# Altium PCB Analizador_de_espectro.PcbDoc (part 1 of 2)
Units mil, origin at the board's own origin, x right, y up, seen from the top; angles counter-clockwise.
Board outline 4891.73 x 3750 mil, 2 copper layers (Top Layer, Bottom Layer); 140 components, 98 nets, 612 pads, 248 vias.
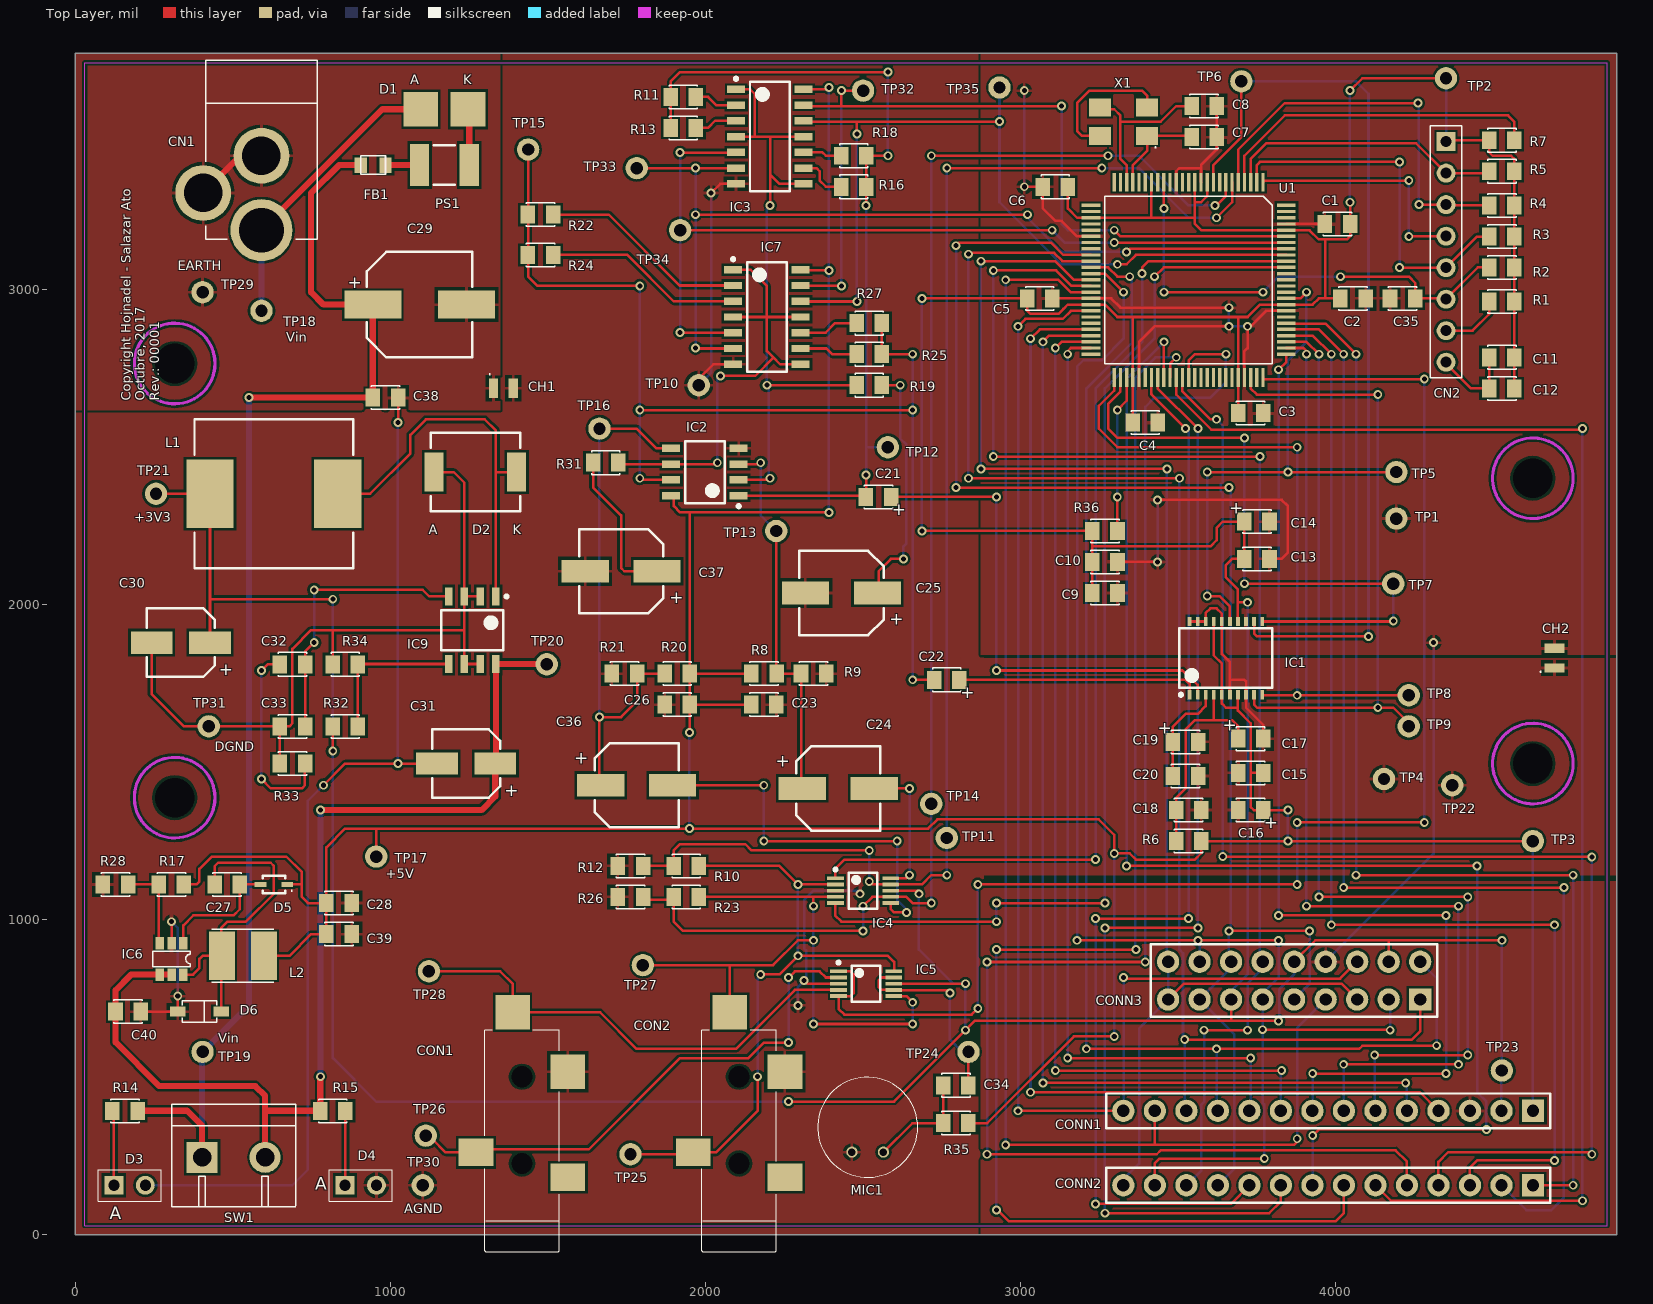
[diagram p0: Top Layer view]
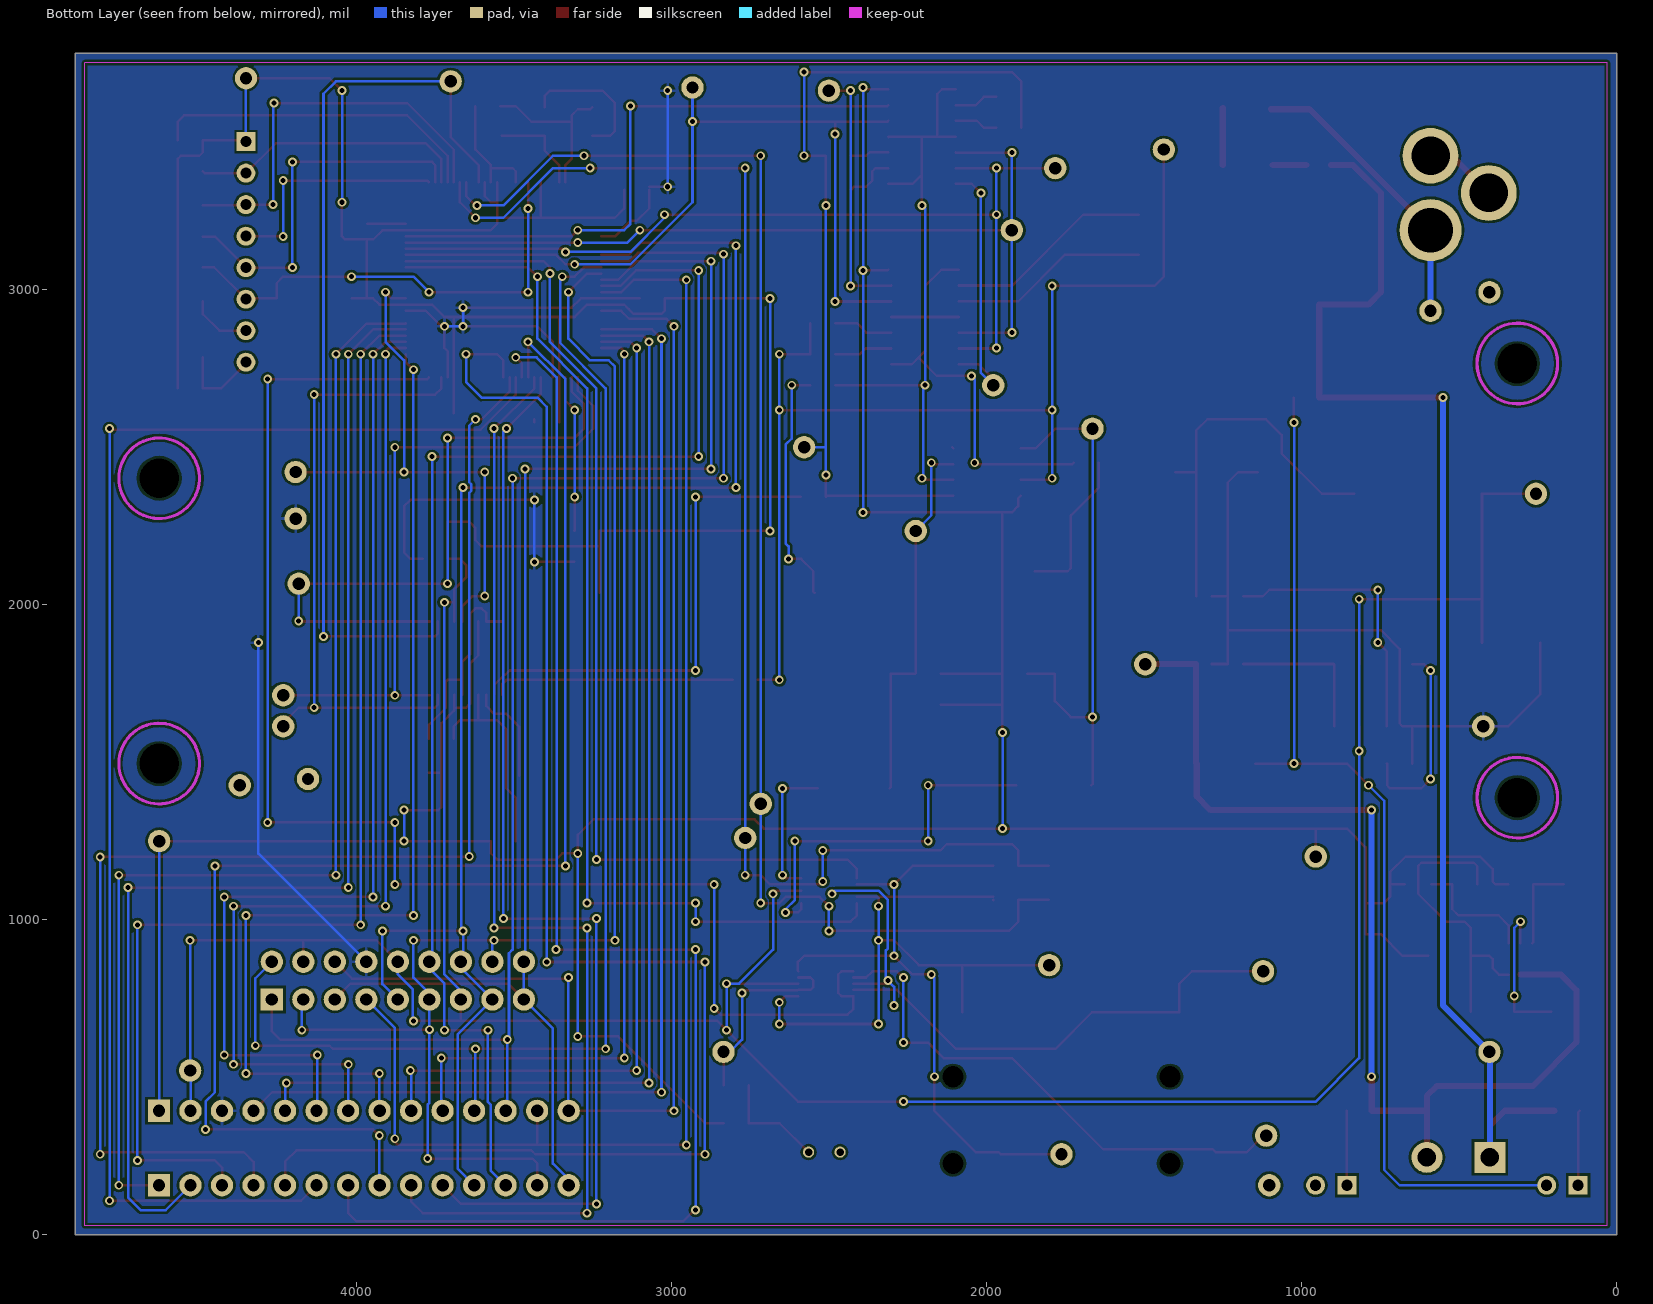
[diagram p1: Bottom Layer view, seen from below]

## Layer stack, top to bottom
Top Solder: solder mask 0.4, Solder Resist, Dk 3.5
Top Layer: signal copper 1.4
Dielectric 1: dielectric 12.6, FR-4, Dk 4.8
Bottom Layer: signal copper 1.4
Bottom Solder: solder mask 0.4, Solder Resist, Dk 3.5

## Board outline
0,0 0,3750 4891.73,3750 4891.73,0

## Design rules (kind name [scope] priority, off if disabled: settings)
Clearance [All] p1: gap=7.87
HoleSize [All] p1: absolutevalues=TRUE maxlimit=200 minlimit=1 maxpercent=80.000 minpercent=20.000
MinimumSolderMaskSliver [All] p1: minsoldermaskwidth=0.79
PolygonConnect [All] p1: connectstyle=Relief reliefconductorwidth=10 reliefentries=4 polygonreliefangle="90 Angle" airgapwidth=10
RoutingVias [All] p1: holewidth=16 width=28 viastyle="Through Hole" minholewidth=16 minwidth=28 maxholewidth=16 maxwidth=28
SolderMaskExpansion [All] p1: expansion=4
Width [All] p1: maxlimit=250 minlimit=8 preferedwidth=8
28 further rules are at their usual default settings.

## Classes and differential pairs
component class U_uc: c1 c2 c4 C4 c5 c6 c7 c8 c9 c10 c11 C12 c35 CN2 CONN1 CONN2 CONN3 R1 R2 R3 R4 R5 R7 R36 U1 X1
component class U_Signal_imputs: C34 CON1 CON2 IC5 MIC1 R35 TP22 TP23 TP24 TP25 TP26 TP27 TP28
component class U_Fuente: C27 C28 C29 C30 C31 C32 C33 C38 C39 C40 CH1 CH2 CN1 D1 D2 D3 D4 D5 D6 FB1 IC6 IC9 L1 L2 PS1 R14 R15 R17 R28 R32 R33 R34 SW1 TP17 TP18 TP19 TP20 TP21 TP29 TP30 TP31
component class U_AGC: C23 C24 C25 C26 C36 C37 IC2 IC3 IC4 IC7 R8 R9 R10 R11 R12 R13 R16 R18 R19 R20 R21 R22 R23 R24 R25 R26 R27 R31 TP11 TP12 TP13 TP14 TP15 TP16 TP32 TP33 TP34 TP35
component class U_adc: C13 C14 C15 C16 C17 C18 C19 C20 C21 C22 IC1 R6 TP1 TP2 TP3 TP4 TP5 TP6 TP7 TP8 TP9 TP10

## Components (designator, comment, footprint, x,y, rotation, side; value= is the part's Value field where it differs from the comment)
C1 "100nF 25V X7R Ceramic" C_0805 4005.91,3208.66 r180 top (schematic designator c1)
C2 "100nF 25V X7R Ceramic" C_0805 4055.12,2972.44 r0 top (schematic designator c2)
C3 "100nF 25V X7R Ceramic" C_0805 3730.32,2608.27 r0 top (schematic designator c3)
C4 "100nF 25V X7R Ceramic" C_0805 3395.67,2578.74 r0 top (schematic designator c4)
C5 "100nF 25V X7R Ceramic" C_0805 3061.02,2972.44 r0 top (schematic designator c5)
C6 "100nF 25V X7R Ceramic" C_0805 3110.24,3326.77 r180 top (schematic designator c6)
C7 "18pF 50V COG Ceramic" C_0805 3582.68,3484.25 r180 top (schematic designator c7)
C8 "18pF 50V COG Ceramic" C_0805 3582.68,3582.68 r180 top (schematic designator c8)
C9 "1uF 6V3 X7R Ceramic" C_0805 3267.72,2037.4 r0 top (schematic designator c9)
C10 "10nF 25V X7R Ceramic" C_0805 3267.72,2135.83 r0 top (schematic designator c10)
C11 "10nF 25V X7R Ceramic" C_0805 4527.56,2785.43 r180 top (schematic designator c11)
C12 "100nF 25V X7R Ceramic" C_0805 4527.56,2687.01 r180 top (schematic designator c12)
C13 "100nF 16V Ceramic" C_0805 3750,2145.67 r180 top
C14 "10uF 6V3 Tantalium" C_0805_POL 3750,2263.78 r0 top
C15 "100nF 16V Ceramic" C_0805 3730.32,1466.54 r0 top
C16 "10uF 6V3 Tantalium" C_0805_POL 3730.32,1348.43 r180 top
C17 "10uF 6V3 Tantalium" C_0805_POL 3730.32,1574.8 r0 top
C18 "100nF 16V Ceramic" C_0805 3533.46,1348.43 r180 top
C19 "10uF 6V3 Tantalium" C_0805_POL 3523.62,1564.96 r0 top
C20 "100nF 16V Ceramic" C_0805 3523.62,1456.69 r180 top
C21 "1uF 16V Tantalium" C_0805_POL 2549.21,2342.52 r180 top
C22 "1uF 16V Tantalium" C_0805_POL 2765.75,1761.81 r180 top
C23 "1uF 16V Ceramic" C_0805 2185.04,1683.07 r0 top
C24 "100uF 16V Elect. Alum." C_AE7066X54M 2421.26,1417.32 r0 top
C25 "100uF 16V Elect. Alum." C_AE7066X54M 2431.1,2037.4 r180 top
C26 "1uF 16V Ceramic" C_0805 1910.08,1683.07 r180 top
C27 "100nF 16V X7R" C_0805 481.65,1112.2 r180 top
C28 "10uF 10V X7R" C_0805 836.61,1053.15 r0 top
C29 "100uF 50V ElecAlum" C_AE10083X105M 1092.52,2952.76 r0 top
C30 "100uF 6V3 ElecAlum" C_AE6553X54M 334.65,1879.92 r180 top
C31 "4.7uF 50V ElecAlum" C_AE6553X54M 1240.16,1496.06 r180 top
C32 "15nF 50V Ceramic" C_0805 688.98,1811.02 r180 top
C33 "100pF 25V Ceramic" C_0805 688.98,1614.17 r180 top
C34 "2.2u 6V3 X5R Ceramic" C_0805 2794.45,474.8 r0 top
C35 "100nF 25V X7R Ceramic" C_0805 4212.6,2972.44 r180 top (schematic designator c35)
C36 "100uF 16V Elect. Alum." C_AE7066X54M 1781.5,1427.17 r0 top
C37 "100uF 16V Elect. Alum." C_AE7066X54M 1732.28,2106.3 r180 top
C38 "100nF 35V Ceramic" C_0805 984.25,2657.48 r0 top
C39 "10uF 10V X7R" C_0805 836.61,954.72 r0 top
C40 "2.2uF 50V X7R" C_0805 167.32,708.66 r0 top
CH1 "Choke" I_CHOQUE_DFN 1358.27,2687.01 r0 top
CH2 "Choke" I_CHOQUE_DFN 4694.88,1830.71 r90 top
CN1 "DC Jack" Jack_PJ002A 590.55,3188.98 r90 top
CN2 "CONN_82" HDR_M_08P_0.1 4350.39,3120.08 r270 top
CON1 "AUD_IN" "AUDIO_JACK 3.5MM SMD" 1417.32,364.17 r90 top
CON2 "AUD_IN" "AUDIO_JACK 3.5MM SMD" 2106.3,364.17 r90 top
CONN1 "CON_14" "1x14x2.54 Pin Header TH V" 3976.38,393.7 r180 top
CONN2 "CON_14" "1x14x2.54 Pin Header TH V" 3976.38,157.48 r180 top
CONN3 "CON_18" "2x9x2.54 Pin Header TH V" 3868.11,807.09 r180 top
D1 "CDBA140-G" D_DO-214AC_SCHOTTKY 1171.26,3572.83 r0 top
D2 "STPS3L40" D_M6959X25N 1269.68,2421.26 r0 top
D3 "LED" LED_TH 172.05,157.48 r0 top
D4 "LED" LED_TH 905.51,157.48 r0 top
D5 "1N4148WS" 1N4148WS 629.92,1112.2 r180 top
D6 "MBRX160TP" SOD_123 393.7,708.66 r180 top
FB1 "Ferrite Bead" Ferrite_bead 984.25,3395.67 r180 top
IC1 "PCM1802" SSOP_DB20 3651.57,1830.71 r90 top
IC2 "MCP6022" SOIC_D8 1998.03,2421.26 r180 top
IC3 "74LVC4066" SO14 2204.13,3486.18 r0 top
IC4 "TS5A23157" TSSOP50P490X110-10N 2500,1092.52 r0 top
IC5 "TS5A23157" TSSOP50P490X110-10N 2509.84,797.24 r0 top
IC6 "MCP" SOT23_6P 305.12,875.98 r180 top
IC7 "74LVC4066" SO14 2194.88,2913.39 r0 top
IC9 "L5972D" SO8 1259.84,1919.29 r270 top
L1 "47uH" I_P128122X60N -383.86,2893.7 r180 top
L2 "LQH44PN220MP0L" VLCF5028 531.5,885.83 r0 top
MIC1 "Mic" MIC_CMA-4544PF-W 2514.61,341.38 r270 top
PS1 "Polyswitch" POLISWITCH_1 1171.26,3395.67 r180 top
R1 "10k 5% 1/8W" R_0805 4527.56,2962.6 r0 top
R2 "10k 5% 1/8W" R_0805 4527.56,3070.87 r0 top
R3 "10k 5% 1/8W" R_0805 4527.56,3169.29 r0 top
R4 "10k 5% 1/8W" R_0805 4527.56,3267.72 r0 top
R5 "10k 5% 1/8W" R_0805 4527.56,3375.98 r0 top
R6 "1k 1/8W" R_0805 3533.46,1250 r180 top
R7 "10k 5% 1/8W" R_0805 4527.56,3474.41 r180 top
R8 "100k 1/8W" R_0805 2185.67,1781.5 r180 top
R9 "100k 1/8W" R_0805 2343.15,1781.5 r180 top
R10 "100k 1/8W" R_0805 1938.98,1171.26 r180 top
R11 "590 1/8W" R_0805 1929.13,3612.2 r0 top
R12 "33k 1/8W" R_0805 1761.81,1171.26 r180 top
R13 "2k2 1/8W" R_0805 1929.13,3513.78 r0 top
R14 "Res1" R_0805 157.48,393.7 r180 top
R15 "Res1" R_0805 816.93,393.7 r180 top
R16 "3k9 1/8W" R_0805 2470.47,3326.77 r180 top
R17 "30k9 1%" R_0805 304.49,1112.2 r0 top
R18 "100k 1/8W" R_0805 2470.47,3425.2 r180 top
R19 "1k 1/8W" R_0805 2519.68,2696.85 r0 top
R20 "100k 1/8W" R_0805 1910.08,1781.5 r0 top
R21 "100k 1/8W" R_0805 1742.76,1781.5 r0 top
R22 "590 1/8W" R_0805 1476.38,3238.19 r0 top
R23 "100k 1/8W" R_0805 1938.98,1072.83 r180 top
R24 "2k2 1/8W" R_0805 1476.38,3110.24 r0 top
R25 "3k9 1/8W" R_0805 2519.68,2795.28 r180 top
R26 "33k 1/8W" R_0805 1761.81,1072.83 r180 top
R27 "100k 1/8W" R_0805 2519.68,2893.7 r180 top
R28 "30k9 1%" R_0805 127.32,1112.2 r0 top
R31 "1k 1/8W" R_0805 1683.07,2450.79 r180 top
R32 "8k2 1/4W" R_0805 856.3,1614.17 r0 top
R33 "10k 1/4W" R_0805 688.98,1496.06 r0 top
R34 "5k1 1/4W" R_0805 856.3,1811.02 r0 top
R35 "2k2 1/8W" R_0805 2794.45,354.8 r0 top
R36 "10k 5% 1/8W" R_0805 3267.72,2234.25 r180 top
SW1 "Switch" BORNERA_2X5MM 501.97,246.06 r180 top
TP1 "TP" TP 4192.91,2273.62 r0 top
TP2 "TP" TP 4350.39,3671.26 r0 top
TP3 "TP" TP 4625.98,1250 r0 top
TP4 "TP" TP 4153.54,1446.85 r0 top
TP5 "TP" TP 4192.91,2421.26 r0 top
TP6 "TP" TP 3700.79,3661.42 r0 top
TP7 "TP" TP 4183.07,2066.93 r0 top
TP8 "TP" TP 4232.28,1712.6 r0 top
TP9 "TP" TP 4232.28,1614.17 r0 top
TP10 "TP" TP 1978.35,2696.85 r90 top
TP11 "TP" TP 2765.75,1259.84 r0 top
TP12 "TP" TP 2578.74,2500 r90 top
TP13 "TP" TP 2224.41,2234.25 r90 top
TP14 "TP" TP 2716.54,1368.11 r90 top
TP15 "TP" TP 1437.01,3444.88 r90 top
TP16 "TP" TP 1663.39,2559.06 r90 top
TP17 "TP" TP 954.72,1200.79 r90 top
TP18 "TP" TP 590.55,2933.07 r90 top
TP19 "TP" TP 403.54,580.71 r90 top
TP20 "TP" TP 1496.06,1811.02 r90 top
TP21 "TP" TP 255.91,2352.36 r0 top
TP22 "TP" TP 4370.08,1427.17 r90 top
TP23 "TP" TP 4527.56,521.65 r90 top
TP24 "TP" TP 2834.65,580.71 r90 top
TP25 "TP" TP 1761.81,255.91 r90 top
TP26 "TP" TP 1112.2,314.96 r90 top
TP27 "TP" TP 1801.18,856.3 r90 top
TP28 "TP" TP 1122.05,836.61 r90 top
TP29 "TP" TP 403.54,2992.13 r90 top
TP30 "TP" TP 1102.36,157.48 r90 top
TP31 "TP" TP 423.23,1614.17 r0 top
TP32 "TP" TP 2500,3631.89 r90 top
TP33 "TP" TP 1781.5,3385.83 r90 top
TP34 "TP" TP 1919.29,3188.98 r90 top
TP35 "TP" TP 2933.07,3641.73 r90 top
U1 "LPC1769FBD100" LQFP100 3533.46,3031.5 r180 top
X1 "XTAL_HF" ABMC_XTAL 3326.77,3533.46 r180 top

## Footprints (in the part's own frame and the unit in brackets; to place one, negate y for a bottom-side part, rotate by r counter-clockwise, add the part's x,y. Pads: shape width x height; smd on the part's side, far side on the other; paste and mask are expansions set on the pad)
1N4148WS [mm] "SODFL, 2-Leads, Body 1.25x2.50mm, IPC Medium Density"
  rect 0.95x0.4 smd: 1(-1.075,0) 2(1.075,0)
  silkscreen extent -1.5,-0.7 0.9,0.7, body extent -0.9,-0.67 0.9,0.67, height 0.9
"1x14x2.54 Pin Header TH V" [mm] "1x14x2.54 Pin Header TH V"
  rect 1.8x1.8 hole 1: 1(-16.51,0)
  round 1.8 hole 1: 2(-13.97,0) 3(-11.43,0) 4(-8.89,0) 5(-6.35,0) 6(-3.81,0) 7(-1.27,0) 8(1.27,0) 9(3.81,0) 10(6.35,0) 11(8.89,0) 12(11.43,0) 13(13.97,0) 14(16.51,0)
  silkscreen extent -17.91,-1.4 17.91,1.4
"2x9x2.54 Pin Header TH V" [mm] "2x9x2.54 Pin Header TH V"
  rect 1.8x1.8 hole 1: 1(-10.16,1.524)
  round 1.8 hole 1: 2(-7.62,1.524) 3(-5.08,1.524) 4(-2.54,1.524) 5(0,1.524) 6(2.54,1.524) 7(5.08,1.524) 8(7.62,1.524) 9(10.16,1.524) 10(-10.16,-1.524) 11(-7.62,-1.524) 12(-5.08,-1.524) 13(-2.54,-1.524) 14(0,-1.524) 15(2.54,-1.524) 16(5.08,-1.524) 17(7.62,-1.524) 18(10.16,-1.524)
  silkscreen extent -11.56,-2.92 11.56,2.92
ABMC_XTAL [mm] "ABM3C-12.000MHZ-D4Y-T"
  rect 1.75x1.45 smd: 1(-1.9,1.15) 2(-1.9,-1.15) 3(1.9,-1.15) 4(1.9,1.15)
  silkscreen extent -2.63,2.03 -2.53,2.12, body extent -2.58,-1.68 2.57,1.68, height 1.3
"AUDIO_JACK 3.5MM SMD" [mm] "SJ-3524-SMT"
  rect 2.8x2.8 smd: 1(3.9,-3.7) 2(8.7,0.75)
  rect 2.2x2.8 smd: 3(-2.6,3.7) 4(-4.6,-3.7)
  round 0 hole 1.7: ""(-3.5,0) ""(3.5,0)
  silkscreen extent -10.6,-3 7.3,3, body extent -9.5,-4.55 9.5,4.45, height 5.3
BORNERA_2X5MM [mm]
  rect 2.5x2.5 hole 1.5: 1(2.54,0)
  round 2.5 hole 1.5: 2(-2.54,0)
  silkscreen extent -5,-4.3 5,4
C_0805 [mm]
  rect 0.5x1.25 on Mech3: 0(-0.75,0) 0(0.75,0)
  rect 1.175x1.45 smd: 1(-1.016,0) 2(1.016,0)
  silkscreen extent -1.14,-0.95 1.14,0.95
C_0805_POL [mm]
  rect 0.5x1.25 on Mech3: 0(-0.75,0) 0(0.75,0)
  rect 1.175x1.45 smd: 1(-1.016,0) 2(1.016,0)
  silkscreen extent -1.14,-0.95 1.14,0.95
C_AE6553X54M [mm] "Aluminum Electrolytic Capacitor, 4.7uF, 50V"
  rect 3.35x1.8 smd: 1(-2.35,0) 2(2.35,0)
  silkscreen extent -2.75,-2.75 2.75,2.75, body extent -2.75,-2.75 2.75,2.75, height 5.4
C_AE7066X54M [mm] "Aluminum Electrolytic Capacitor, 100uF, 16V"
  rect 3.8x1.85 smd: 1(-2.9,0) 2(2.9,0)
  silkscreen extent -3.4,-3.4 3.4,3.4, body extent -3.4,-3.4 3.4,3.4, height 5.4
C_AE10083X105M [mm] "Aluminum Electrolytic Capacitor, 100uF, 50V"
  rect 4.6x2.25 smd: 1(-3.775,0) 2(3.775,0)
  silkscreen extent -4.25,-4.25 4.25,4.25, body extent -4.25,-4.25 4.25,4.25, height 10.5
D_DO-214AC_SCHOTTKY [mm] "CDBA140-G"
  rect 2.8x2.8 smd: 1(-1.9,0) 2(1.9,0)
  body extent -2.25,-1.4 2.25,1.39, height 2.29
D_M6959X25N [mm] "Diodo STPS3L40-Y"
  rect 1.54x3.14 smd: 1(-3.325,0) 2(3.325,0)
  silkscreen extent -3.6,-3.15 3.6,3.15, body extent -3.57,-3.13 3.57,3.13, height 2.45
Ferrite_bead [mm]
  rect 1x1.25 smd: 1(0,0) 2(2,0)
  silkscreen extent 0,-0.75 2,0.75
HDR_M_08P_0.1 [mil]
  rect 60x60 hole 35: 1(-350,0)
  round 60 hole 35: 2(-250,0) 3(-150,0) 4(-50,0) 5(50,0) 6(150,0) 7(250,0) 8(350,0)
  silkscreen extent -400,-50 400,50
I_CHOQUE_DFN [mm] "Chip Power Inductor BRC2012T2R2MD"
  rect 0.75x1.6 smd: 1(-0.8,0) 2(0.8,0)
  silkscreen extent -1.15,1.08 -1.05,1.17, body extent -1.1,-0.72 1.1,0.72, height 1.4
I_P128122X60N [mm] "Inductor SMD 744771147"
  rect 3.8x5.5 smd: 1(-30.9,13.75) 2(-20.6,13.75)
  silkscreen extent -32.15,7.75 -19.35,19.75, body extent -32.15,7.75 -19.35,19.75, height 6
Jack_PJ002A [mm]
  round 5 hole 3.6: 1(0,0)
  round 4.5 hole 3.1: 2(6,0) 3(3,4.7)
  silkscreen extent -0.75,-4.5 13.7,4.5
LED_TH [mil]
  rect 60x60 hole 35 paste+0: 1(-50,0)
  round 60 hole 35 paste+0: 2(50,0)
  silkscreen extent -100,-50 100,50
LQFP100 [mm]
  rect 0.27x1.5 smd: 1(-6,-7.875) 2(-5.5,-7.875) 3(-5,-7.875) 4(-4.5,-7.875) 5(-4,-7.875) 6(-3.5,-7.875) 7(-3,-7.875) 8(-2.5,-7.875) 9(-2,-7.875) 10(-1.5,-7.875) 11(-1,-7.875) 12(-0.5,-7.875) 13(0,-7.875) 14(0.5,-7.875) 15(1,-7.875) 16(1.5,-7.875) 17(2,-7.875) 18(2.5,-7.875) 19(3,-7.875) 20(3.5,-7.875) 21(4,-7.875) 22(4.5,-7.875) 23(5,-7.875) 24(5.5,-7.875) 25(6,-7.875) 51(6,7.875) 52(5.5,7.875) 53(5,7.875) 54(4.5,7.875) 55(4,7.875) 56(3.5,7.875) 57(3,7.875) 58(2.5,7.875) 59(2,7.875) 60(1.5,7.875) 61(1,7.875) 62(0.5,7.875) 63(0,7.875) 64(-0.5,7.875) 65(-1,7.875) 66(-1.5,7.875) 67(-2,7.875) 68(-2.5,7.875) 69(-3,7.875) 70(-3.5,7.875) 71(-4,7.875) 72(-4.5,7.875) 73(-5,7.875) 74(-5.5,7.875) 75(-6,7.875)
  rect 1.5x0.27 smd: 26(7.875,-6) 27(7.875,-5.5) 28(7.875,-5) 29(7.875,-4.5) 30(7.875,-4) 31(7.875,-3.5) 32(7.875,-3) 33(7.875,-2.5) 34(7.875,-2) 35(7.875,-1.5) 36(7.875,-1) 37(7.875,-0.5) 38(7.875,0) 39(7.875,0.5) 40(7.875,1) 41(7.875,1.5) 42(7.875,2) 43(7.875,2.5) 44(7.875,3) 45(7.875,3.5) 46(7.875,4) 47(7.875,4.5) 48(7.875,5) 49(7.875,5.5) 50(7.875,6) 76(-7.875,6) 77(-7.875,5.5) 78(-7.875,5) 79(-7.875,4.5) 80(-7.875,4) 81(-7.875,3.5) 82(-7.875,3) 83(-7.875,2.5) 84(-7.875,2) 85(-7.875,1.5) 86(-7.875,1) 87(-7.875,0.5) 88(-7.875,0) 89(-7.875,-0.5) 90(-7.875,-1) 91(-7.875,-1.5) 92(-7.875,-2) 93(-7.875,-2.5) 94(-7.875,-3) 95(-7.875,-3.5) 96(-7.875,-4) 97(-7.875,-4.5) 98(-7.875,-5) 99(-7.875,-5.5) 100(-7.875,-6)
  silkscreen extent -6.75,-6.75 6.75,6.75
MIC_CMA-4544PF-W [mm] "CMA-4544PF-W"
  round 0.9 hole 0.6: 1(2,1.27) 2(2,-1.27)
  silkscreen extent -4.04,-4.03 4.04,4.04
POLISWITCH_1 [mm]
  rect 1.55x3.4 smd: 1(-2,0) 2(2,0)
  silkscreen extent -0.85,-1.6 0.85,1.6, body extent -2.42,-1.71 2.41,1.71, height 0.85
R_0805 [mm]
  rect 0.4x1.25 on Mech3: 0(-0.8,0) 0(0.8,0)
  rect 1.175x1.45 smd: 1(-1.016,0) 2(1.016,0)
  silkscreen extent -1.14,-0.95 1.14,0.95
SO8 [mm] "Switching Regulator L5972D"
  rect 1.45x0.6 smd: 1(-2.725,1.905) 2(-2.725,0.635) 3(-2.725,-0.635) 4(-2.725,-1.905) 5(2.725,-1.905) 6(2.725,-0.635) 7(2.725,0.635) 8(2.725,1.905)
  silkscreen extent -2.85,-2.5 1.6,2.88, body extent -2,-2.5 2,2.5, height 1.75
SO14 [mm] "Quad_Bilateral_Switch 74LVC4066"
  rect 1.45x0.6 smd: 1(-2.725,3.81) 2(-2.725,2.54) 3(-2.725,1.27) 4(-2.725,0) 5(-2.725,-1.27) 6(-2.725,-2.54) 7(-2.725,-3.81) 8(2.725,-3.81) 9(2.725,-2.54) 10(2.725,-1.27) 11(2.725,0) 12(2.725,1.27) 13(2.725,2.54) 14(2.725,3.81)
  silkscreen extent -2.85,-4.4 1.6,4.78, body extent -2,-4.4 2,4.4, height 1.75
SOD_123 [mm]
  rect 1.25x0.8 smd: 1(1.75,0) 2(-1.75,0)
  silkscreen extent -1.38,-0.88 1.38,0.88
SOIC_D8 [mm] "MCP6022"
  rect 1.45x0.6 smd: 1(-2.725,1.905) 2(-2.725,0.635) 3(-2.725,-0.635) 4(-2.725,-1.905) 5(2.725,-1.905) 6(2.725,-0.635) 7(2.725,0.635) 8(2.725,1.905)
  silkscreen extent -2.85,-2.5 1.6,2.88, body extent -2,-2.5 2,2.5, height 1.75
SOT23_6P [mil]
  rect 27x40 smd: 1(-37.5,-50) 2(0,-50) 3(37.5,-50) 4(37.5,50) 5(0,50) 6(-37.5,50)
  silkscreen extent -60,-25 60,25
SSOP_DB20 [mm] "PCM1802 Single-Ended Analog-Input 24-Bit"
  rect 0.75x0.3 smd: 1(-2.95,2.925) 2(-2.95,2.275) 3(-2.95,1.625) 4(-2.95,0.975) 5(-2.95,0.325) 6(-2.95,-0.325) 7(-2.95,-0.975) 8(-2.95,-1.625) 9(-2.95,-2.275) 10(-2.95,-2.925) 11(2.95,-2.925) 12(2.95,-2.275) 13(2.95,-1.625) 14(2.95,-0.975) 15(2.95,-0.325) 16(2.95,0.325) 17(2.95,0.975) 18(2.95,1.625) 19(2.95,2.275) 20(2.95,2.925)
  silkscreen extent -3.07,-3.75 2.4,3.75, body extent -2.8,-3.75 2.8,3.75, height 2
TP [mm]
  round 1.8 hole 1: 1(0,0)
TSSOP50P490X110-10N [mm] "TSSOP, 10-Leads, Body 3.00x3.00mm, Pitch 0.50mm, IPC Medium Density"
  rect 1.35x0.3 smd: 1(-2.225,1) 2(-2.225,0.5) 3(-2.225,0) 4(-2.225,-0.5) 5(-2.225,-1) 6(2.225,-1) 7(2.225,-0.5) 8(2.225,0) 9(2.225,0.5) 10(2.225,1)
  silkscreen extent -2.35,-1.45 1.15,1.82, body extent -1.55,-1.45 1.55,1.45, height 1.1
VLCF5028 [mm]
  rect 2.1x3.9 smd: 1(-1.7,0) 2(1.7,0)
  silkscreen extent -2.5,-2.12 2.5,2.12

## Part data
C1 C2 C3 C4 C5 C6 C7 C8 C9 C10 C11 C12 C13 C15 C18 C20 C23 C26 C27 C28 C32 C33 C34 C35 C38 C39 C40: library part Cap1, "Capacitor"
C14 C16 C17 C19 C21 C22 C24 C25 C29 C30 C31 C36 C37: library part Cap_Elec, "Capacitor"
CN1: library part Barrel_jack, "Connector"
CON1 CON2: library part Jack_1
CONN1 CONN2: "CONN TFT 3.5"
CONN3: "CON_TFT_2.8"
D1: library part Diodo_Schottky, "Diodo Schottky"
D2: library part DIODO, "Diode"
D5: library part DIODO, "Diode signal"
D6: library part Diodo_Schottky
IC2: library part OpAmp_Dual
IC3 IC7: library part Q_B_Switch_2
IC4 IC5: library part A_SW_2x2:1_VSSOP, "Analog Switch"
IC6: library part "Sw Source", "Switching Source"
IC9: "Fuente Switching"
L1 L2: library part Inductor, "Inductor"
MIC1: "Microfono"
PS1: library part Poliswitch, "Polishwitch"
R1 R2 R3 R4 R5 R6 R7 R8 R9 R10 R11 R12 R13 R16 R17 R18 R19 R20 R21 R22 R23 R24 R25 R26 R27 R28 R31 R32 R33 R34 R35 R36: library part Res1, "Resistor"
R14 R15: "Resistor"
SW1: library part SW
TP1 TP2 TP3 TP4 TP5 TP6 TP7 TP8 TP9 TP10 TP11 TP12 TP13 TP14 TP15 TP16 TP17 TP18 TP19 TP20 TP21 TP22 TP23 TP24 TP25 TP26 TP27 TP28 TP29 TP30 TP31 TP32 TP33 TP34 TP35: library part "Test Point", "Test Point"
U1: library part LPC1768FBD100, "CPU Cortex M3"
X1: "Crystal"

## Free pads (board coordinates)
  round 0 hole 125.98: M_HOLE(314.96,1387.8) M_HOLE(314.96,2765.75) M_HOLE(4625.98,1496.06) M_HOLE(4625.98,2401.57)

## Via types
v1: diameter 28, hole 16, Top Layer to Bottom Layer, 248 vias

## Nets (pads, with @x,y where several pads share a name; then routed paths per layer and width w, separated by ;. In a path a pad name is that pad's centre, name@x,y a point inside that pad or via, vN(x,y) a via of type N, cw(c..) or ccw(c..) an arc to the next point about the centre after c; other vN are vias at no path point)
+5V: C15.2 C16.1 C23.1 C26.1 C28.1 C39.1 CONN1.1 D5.1 IC1.5 IC1.7 IC1.17 IC2.8 IC3.14 IC7.14 L2.2 R6.1 R8.2 R17.2 R20.2 R35.2 TP3.1 TP17.1 | length 11676.7
  Top Layer w8: R17.2@344.49,1112.2 383.86,1112.2 393.7,1122.05 393.7,1161.42 433.07,1200.79 669.29,1200.79 718.5,1151.57 718.5,1112.2 ; L2.2@598.43,885.83 679.13,885.83 748.03,954.72 C39.1@796.61,954.72 C28.1@796.61,1053.15 ; D5.1@672.24,1112.2 718.5,1112.2 ; TP17.1@954.72,1200.79 954.72,1289.37 ; IC2.8@1890.75,2346.26 1899.61,2337.4 1899.61,2312.99 1919.29,2293.31 1948.82,2293.31 ; v1(1948.82,1594.49) 1950.08,1595.75 C26.1@1950.08,1683.07 ; C23.1@2145.04,1683.07 C26.1@1950.08,1683.07 ; R8.2@2145.67,1781.5 R20.2@1950.08,1781.5 ; IC3.14@2311.42,3636.18 2386.18,3636.18 v1(2391.73,3641.73) ; IC7.14@2312.01,3063.39 2314.37,3061.02 v1(2391.73,3061.02) ; v1(2391.73,2293.31) 1948.82,2293.31 ; R35.2@2834.45,354.8 2894.17,354.8 3169.29,629.92 v1(3297.24,629.92) ; IC1.17@3613.19,1946.85 3613.19,1839.57 3638.78,1813.98 IC1.5@3638.78,1714.57 3638.78,1686.02 3651.57,1673.23 3689.96,1673.23 ; IC1.7@3689.96,1714.57 3689.96,1673.23 ; C15.2@3770.32,1466.54 3730.32,1466.54 ; v1(3848.43,1348.43) C16.1@3770.32,1348.43 3740.16,1348.43 3730.32,1358.27 3730.32,1466.54 ; TP3.1@4625.98,1250 v1(3848.43,1250) R6.1@3573.46,1250 3573.46,1211.26 3553.15,1190.94 3366.14,1190.94 3346.46,1210.63 v1(3297.24,1210.63) 3297.24,1269.69 3248.03,1318.9 2736.22,1318.9 2706.69,1289.37 v1(1948.82,1289.37) 954.72,1289.37 ; 718.5,1112.2 718.5,1072.83 738.19,1053.15 C28.1@796.61,1053.15 ; C28.1@796.61,1053.15 796.61,1229.69 856.3,1289.37 954.72,1289.37 ; 1948.82,2293.31 1950.08,2292.05 R20.2@1950.08,1781.5 ; C26.1@1950.08,1683.07 R20.2@1950.08,1781.5 ; 3689.96,1673.23 3689.96,1664.37 3730.32,1624.02 3730.32,1466.54
  Bottom Layer w8: v1(1948.82,1289.37) v1(1948.82,1594.49) ; v1(2391.73,2293.31) v1(2391.73,3061.02) v1(2391.73,3641.73) ; v1(3297.24,629.92) v1(3297.24,1210.63) ; v1(3848.43,1250) v1(3848.43,1348.43) ; TP3.1@4625.98,1250 4625.98,394.09 CONN1.1@4626.38,393.7
AGND: C15.1 C16.2 C17.2 C18.1 C19.2 C20.1 C23.2 C25.2 C26.2 C28.2 C37.2 C39.2 C40.2 CH1.2 CH2.1 CON1.1 CON2.1 D4.2 D6.1 IC1.6 IC1.8 IC1.16 IC1.18 IC1.19 IC1.20 IC2.4 IC3.7 IC4.3 IC5.3 IC6.2 IC7.7 MIC1.2 R9.1 R12.2 R21.1 R26.2 R28.1 TP4.1 TP10.1 TP22.1 TP30.1 | length 2672.8
  Top Layer w8: C40.2@207.32,708.66 D6.1@324.8,708.66 v1(324.8,757.87) ; IC6.2@305.12,925.98 v1(305.12,994.09) ; TP10.1@1978.35,2696.85 1978.35,2716.54 2025.2,2763.39 IC7.7@2087.6,2763.39 ; v1(2017.72,3307.09) 2046.81,3336.18 IC3.7@2096.85,3336.18 ; IC2.4@2105.31,2496.26 IC2.4@2109.06,2500 ; v1(2312.99,807.09) 2322.83,797.24 IC5.3@2422.24,797.24 ; IC1.20@3536.42,1946.85 IC1.19@3562.01,1946.85 IC1.18@3587.6,1946.85 3587.6,1973.43 3602.36,1988.19 3622.05,1988.19 3638.78,1971.46 IC1.16@3638.78,1946.85 3638.78,1843.5 3664.37,1817.91 IC1.6@3664.37,1714.57 ; 3664.37,1761.81 3710.63,1761.81 3715.55,1756.89 IC1.8@3715.55,1714.57 3715.55,1673.23 3770.32,1618.46 C17.2@3770.32,1574.8
  Bottom Layer w8: v1(305.12,994.09) 324.8,974.41 v1(324.8,757.87) ; TP10.1@1978.35,2696.85 2017.72,2736.22 v1(2017.72,3307.09) ; v1(2293.31,728.35) 2293.31,787.4 v1(2312.99,807.09) 2319.31,813.4 2319.31,902.91 2312.99,909.23 2312.99,1062.99 2342.52,1092.52 2480.3,1092.52 v1(2490.15,1082.67)
CTRL_MUX: IC5.1 IC5.5 U1.75 | length 4591.1
  Top Layer w8: IC5.1@2422.24,836.61 2460.63,836.61 2470.47,826.77 2470.47,767.72 2460.63,757.87 IC5.5@2422.24,757.87 2422.24,717.52 2440.95,698.82 2844.49,698.82 v1(2864.17,718.5) ; v1(2864.17,1112.2) v1(3877.95,1112.2) ; U1.75@3769.69,2721.46 3774.61,2716.54 v1(4281.5,2716.54) ; v1(3877.95,1309.06) v1(4281.5,1309.06)
  Bottom Layer w8: v1(2864.17,718.5) v1(2864.17,1112.2) ; v1(3877.95,1112.2) v1(3877.95,1309.06) ; v1(4281.5,1309.06) v1(4281.5,2716.54)
D/C: CONN1.11 CONN3.10 U1.36 | length 4251.8
  Top Layer w8: v1(3208.66,590.55) v1(3622.05,590.55) 4074.8,590.55 4084.65,600.39 v1(4320.87,600.39) ; U1.36@3223.43,3070.87 3277.56,3070.87 3307.09,3041.33 v1(3346.45,3041.33)
  Bottom Layer w8: v1(3208.66,590.55) 3208.66,2687.01 3352.77,2831.12 3352.77,3035.01 v1(3346.45,3041.33) ; v1(3622.05,590.55) 3622.05,398.03 CONN1.11@3626.38,393.7 ; CONN3.10@4268.11,867.09 4320.87,814.33 v1(4320.87,600.39)
E1: IC3.13 IC7.13 TP32.1 U1.95 | length 2791.6
  Top Layer w8: IC7.13@2302.17,3013.39 2303.74,3011.81 v1(2431.1,3011.81) ; IC3.13@2311.42,3586.18 2314.92,3582.68 2431.1,3582.68 ; TP32.1@2500,3631.89 v1(2431.1,3631.89) 2431.1,3582.68 ; v1(3129.92,3582.68) 2431.1,3582.68 ; v1(3297.24,3188.98) 3316.93,3169.29 U1.95@3843.5,3169.29
  Bottom Layer w8: v1(2431.1,3011.81) v1(2431.1,3631.89) ; v1(3129.92,3582.68) 3129.92,3208.66 3149.61,3188.98 v1(3297.24,3188.98)
E2: IC3.5 IC7.5 TP34.1 U1.94 | length 2858.7
  Top Layer w8: v1(1919.29,2864.17) 1920.08,2863.39 IC7.5@2087.6,2863.39 ; TP34.1@1919.29,3188.98 v1(3100.39,3188.98) ; v1(1919.29,3435.04) 2096.85,3435.04 IC3.5@2096.85,3436.18 ; v1(3297.24,3149.61) U1.94@3843.5,3149.61
  Bottom Layer w8: v1(1919.29,2864.17) TP34.1@1919.29,3188.98 v1(1919.29,3435.04) ; v1(3100.39,3188.98) 3139.76,3149.61 v1(3297.24,3149.61)
E3: IC3.6 IC7.6 TP33.1 U1.93 | length 2939.9
  Top Layer w8: TP33.1@1781.5,3385.83 v1(1968.5,3385.83) 2096.5,3385.83 IC3.6@2096.85,3386.18 ; v1(1968.5,2814.96) 1970.08,2813.39 IC7.6@2087.6,2813.39 ; v1(1968.5,3238.19) v1(3021.65,3238.19) ; v1(3336.61,3120.08) 3346.46,3129.92 U1.93@3843.5,3129.92
  Bottom Layer w8: v1(1968.5,2814.96) v1(1968.5,3238.19) v1(1968.5,3385.83) ; v1(3021.65,3238.19) 3021.65,3228.35 3129.92,3120.08 v1(3336.61,3120.08)
E4: IC3.12 IC7.12 TP35.1 U1.92 | length 2740.5
  Top Layer w8: IC7.12@2302.17,2963.39 2302.95,2962.6 v1(2480.32,2962.6) ; IC3.12@2311.42,3536.18 2314.13,3533.46 2480.32,3533.46 ; v1(2480.32,3494.09) 2480.32,3533.46 ; v1(2933.07,3533.46) 2480.32,3533.46 ; v1(3307.09,3080.71) 3336.61,3080.71 3366.14,3110.24 U1.92@3843.5,3110.24
  Bottom Layer w8: v1(2480.32,2962.6) v1(2480.32,3494.09) ; TP35.1@2933.07,3641.73 v1(2933.07,3533.46) 2933.07,3277.56 3129.92,3080.71 v1(3307.09,3080.71)
EARTH: C29.2 C31.2 C38.2 CH1.1 CN1.2 CN1.3 D3.2 TP29.1 | length 3561.8
  Top Layer w8: CN1.2@523.62,3425.2 CN1.2@590.55,3425.2 ; v1(787.4,1427.17) 856.3,1496.06 v1(1023.62,1496.06) C31.2@1147.64,1496.06 ; v1(1023.62,2578.74) 1024.25,2579.37 C38.2@1024.25,2657.48
  Top Layer w19.68: CN1.3@405.51,3307.09 CN1.2@523.62,3425.2
  Bottom Layer w8: D3.2@222.05,157.48 688.98,157.48 738.19,206.69 738.19,1377.95 v1(787.4,1427.17) ; v1(1023.62,1496.06) v1(1023.62,2578.74)
GND: C1.2 C2.2 C3.2 C4.2 C5.2 C6.2 C7.1 C8.1 C9.2 C10.2 C13.1 C14.2 C30.2 C33.2 C35.2 CH2.2 CONN1.3 CONN3.13 D2.1 IC1.13 IC9.2 IC9.3 IC9.6 IC9.7 R33.1 R34.1 TP1.1 TP31.1 U1.11 U1.15 U1.31 U1.41 U1.55 U1.72 U1.83 U1.97 | length 7133.7
  Top Layer w8: C30.2@242.13,1879.92 242.13,1716.54 344.49,1614.17 C33.2@648.98,1614.17 ; R33.1@648.98,1496.06 C33.2@648.98,1614.17 ; R34.1@816.3,1811.02 816.3,1918.66 816.93,1919.29 ; D2.1@1138.78,2421.26 1200.79,2421.26 1234.84,2387.2 IC9.3@1234.84,2026.57 ; 1234.84,1919.29 816.93,1919.29 ; IC9.7@1284.84,1812.01 IC9.6@1234.84,1812.01 IC9.3@1234.84,2026.57 ; IC9.2@1284.84,2026.57 IC9.3@1234.84,2026.57 ; v1(3011.81,3326.77) C6.2@3070.24,3326.77 ; C6.2@3070.24,3316.93 3070.24,3258.5 3110.24,3218.5 3129.92,3218.5 3179.13,3169.29 U1.31@3223.43,3169.29 ; C5.2@3101.02,2972.44 U1.41@3223.43,2972.44 3287.4,2972.44 3316.93,2942.91 v1(3661.42,2942.91) ; C10.2@3307.72,2135.83 v1(3435.04,2135.83) ; U1.55@3375.98,2721.46 3375.98,2834.65 3425.19,2883.85 v1(3661.42,2883.86) ; v1(3435.04,2332.68) 3828.74,2332.68 3848.43,2312.99 3848.43,2165.35 3828.74,2145.67 C13.1@3790,2145.67 ; C4.2@3435.67,2578.74 C4.2@3435.67,2589.21 ; U1.15@3494.09,3341.54 3494.09,3375.98 3503.94,3385.83 3572.83,3385.83 ; U1.11@3572.83,3341.54 3572.83,3385.83 ; C8.1@3622.68,3582.68 C7.1@3622.68,3484.25 3622.05,3483.62 3622.05,3444.88 3572.83,3395.67 3572.83,3385.83 ; U1.72@3710.63,2721.46 3710.63,2805.12 3720.47,2814.96 v1(3720.47,2883.86) 3730.32,2883.86 3779.53,2933.07 U1.83@3843.5,2933.07 ; U1.97@3843.5,3208.66 3926.54,3208.66 C1.2@3965.91,3208.66 ; C33.2@648.98,1614.17 679.13,1614.17 688.98,1624.02 688.98,1860.24 748.03,1919.29 816.93,1919.29
  Bottom Layer w8: v1(3011.81,3326.77) v1(3011.81,3631.89) ; v1(3435.04,2135.83) v1(3435.04,2332.68) ; v1(3661.42,2942.91) v1(3661.42,2883.86) v1(3720.47,2883.86) ; CONN3.13@3968.11,867.09 4311.02,1210 v1(4311.02,1879.92)
GPIO0.0: CONN1.4 U1.46 | length 3915.2
  Top Layer w8: v1(3031.5,452.76) 4267.32,452.76 CONN1.4@4326.38,393.7 ; v1(3031.5,2844.49) 3061.02,2874.02 U1.46@3223.43,2874.02
  Bottom Layer w8: v1(3031.5,452.76) v1(3031.5,2844.49)
GPIO0.1: CONN1.5 U1.47 | length 3754.9
  Top Layer w8: v1(3070.87,482.28) v1(4222.44,482.28) ; v1(3070.87,2834.65) 3090.55,2854.33 U1.47@3223.43,2854.33
  Bottom Layer w8: v1(3070.87,482.28) v1(3070.87,2834.65) ; v1(4222.44,482.28) 4226.38,478.35 CONN1.5@4226.38,393.7
GPIO0.4: CONN2.1 U1.81 | length 3717.2
  Top Layer w8: U1.81@3843.5,2893.7 3843.5,2892.65 3967.58,2892.65 v1(4064.96,2795.28) ; v1(4064.96,1141.73) v1(4753.94,1141.73) ; CONN2.1@4626.38,157.48 v1(4753.94,157.48)
  Bottom Layer w8: v1(4064.96,1141.73) v1(4064.96,2795.28) ; v1(4753.94,157.48) v1(4753.94,1141.73)
GPIO0.5: CONN2.2 U1.80 | length 3837.6
  Top Layer w8: U1.80@3843.5,2874.02 3946.85,2874.02 v1(4025.59,2795.28) ; v1(4025.59,1102.36) v1(4724.41,1102.36)
  Bottom Layer w8: v1(4025.59,1102.36) v1(4025.59,2795.28) ; CONN2.2@4526.38,157.48 4605.12,78.74 4685.04,78.74 4724.41,118.11 v1(4724.41,1102.36)
GPIO0.6: CONN2.3 U1.79 | length 3769
  Top Layer w8: U1.79@3843.5,2854.33 3927.17,2854.33 v1(3986.22,2795.28) ; v1(3986.22,984.25) v1(4694.88,984.25) ; CONN2.3@4426.38,157.48 4426.38,213.78 4448.82,236.22 v1(4694.88,236.22)
  Bottom Layer w8: v1(3986.22,984.25) v1(3986.22,2795.28) ; v1(4694.88,236.22) v1(4694.88,984.25)
GPIO0.15: CONN2.4 U1.62 | length 4291.7
  Top Layer w8: U1.62@3513.78,2721.46 3513.78,2677.17 3602.37,2588.58 v1(3622.04,2588.58) ; v1(3641.73,1200.79) 4811.66,1200.79 v1(4812.99,1199.46) ; CONN2.4@4326.38,157.48 4326.38,231.89 4356.71,262.22 4806.68,262.22 v1(4812.99,255.91)
  Bottom Layer w8: v1(3622.04,2588.58) 3641.73,2568.88 3641.73,2388.95 3635.54,2382.76 3635.54,2361.33 3641.73,2355.14 v1(3641.73,1200.79) v1@3631.87,1200.79 ; v1(4812.99,255.91) v1(4812.99,1199.46)
GPIO0.16: CONN2.5 U1.63 | length 4858.9
  Top Layer w8: v1(2893.7,255.91) 3432.1,255.91 3444.25,268.06 4190.6,268.06 4226.38,232.28 CONN2.5@4226.38,157.48 ; v1(2893.7,866.14) v1(3395.67,866.14) ; U1.63@3533.46,2721.46 3533.46,2775.59 3553.15,2795.28 v1(3651.57,2795.28)
  Bottom Layer w8: v1(2893.7,255.91) v1(2893.7,866.14) ; v1(3395.67,866.14) 3395.67,2627.95 3425.2,2657.48 3602.36,2657.48 3651.57,2706.69 v1(3651.57,2795.28)
GPIO0.17: CONN2.6 U1.61 | length 4519.5
  Top Layer w8: U1.61@3494.09,2721.46 3494.09,2667.32 3605.89,2555.53 4779.94,2555.53 v1(4783.46,2559.06) ; CONN2.6@4126.38,157.48 4175.59,108.27 v1(4783.46,108.27)
  Bottom Layer w8: v1(4783.46,108.27) v1(4783.46,2559.06)
GPIO0.18: CONN2.7 U1.60 | length 4531.5
  Top Layer w8: v1(2923.23,78.74) 2926.76,78.74 2962.6,42.9 3999.59,42.9 4026.38,69.69 CONN2.7@4026.38,157.48 ; v1(2923.23,905.51) v1(3366.14,905.51) ; U1.60@3474.41,2721.46 3474.41,2765.75 v1(3494.09,2785.43)
  Bottom Layer w8: v1(2923.23,78.74) v1(2923.23,905.51) ; v1(3366.14,905.51) 3364.67,906.98 3364.67,2721.96 3428.14,2785.43 v1(3494.09,2785.43)
GPIO0.19: CONN2.8 U1.59 | length 4504.8
  Top Layer w8: v1(3336.61,1171.26) v1(4448.82,1171.26) ; U1.59@3454.72,2721.46 v1(3454.72,2834.65) ; CONN2.8@3926.38,157.48 CONN2.8@3927.17,158.27 ; v1(3927.17,314.96) 3946.85,334.65 v1(4478.35,334.65)
  Bottom Layer w8: v1(3336.61,1171.26) 3336.61,2716.54 v1(3454.72,2834.65) ; CONN2.8@3926.38,157.48 3927.17,158.27 v1(3927.17,314.96) ; v1(4448.82,1171.26) 4448.82,452.76 4478.35,423.23 v1(4478.35,334.65)
GPIO0.20: CONN2.9 U1.58 | length 3626.4
  Top Layer w8: v1(3267.72,68.9) 3789.37,68.9 3826.38,105.91 CONN2.9@3826.38,157.48 ; v1(3267.72,974.41) v1(3562.99,974.41) ; U1.58@3435.04,2721.46 3435.04,2687.01 v1(3562.99,2559.06)
  Bottom Layer w8: v1(3267.72,68.9) v1(3267.72,974.41) ; v1(3562.99,974.41) v1(3562.99,2559.06)
GPIO0.21: CONN2.10 U1.57 | length 3493.9
  Top Layer w8: v1(3238.19,98.43) 3667.32,98.43 CONN2.10@3726.38,157.48 ; v1(3238.19,1003.94) v1(3533.46,1003.94) ; U1.57@3415.35,2721.46 3415.35,2667.52 3415.53,2667.52 3523.62,2559.43 v1(3523.62,2559.06)
  Bottom Layer w8: v1(3238.19,98.43) 3248.03,98.43 3238.19,108.27 v1(3238.19,1003.94) ; v1(3523.62,2559.06) 3533.46,2549.21 v1(3533.46,1003.94)
L-CH: CON1.2 IC5.4 TP28.1 | length 1532.6
  Top Layer w8: TP28.1@1122.05,836.61 1348.43,836.61 1387.8,797.24 CON1.2@1387.8,706.69 1665.35,706.69 1781.5,590.55 2096.46,590.55 2283.46,777.56 IC5.4@2422.24,777.56